# Altium PCB PCB.PcbDoc
Units mm, origin at the board's own origin, x right, y up, seen from the top; angles counter-clockwise.
Board outline 100 x 100 mm, 2 copper layers (Top Layer, Bottom Layer), stack 1.036 mm thick; 40 components, 36 nets, 236 pads, 4 vias.
Unrouted connection lines stored in the file: 122.
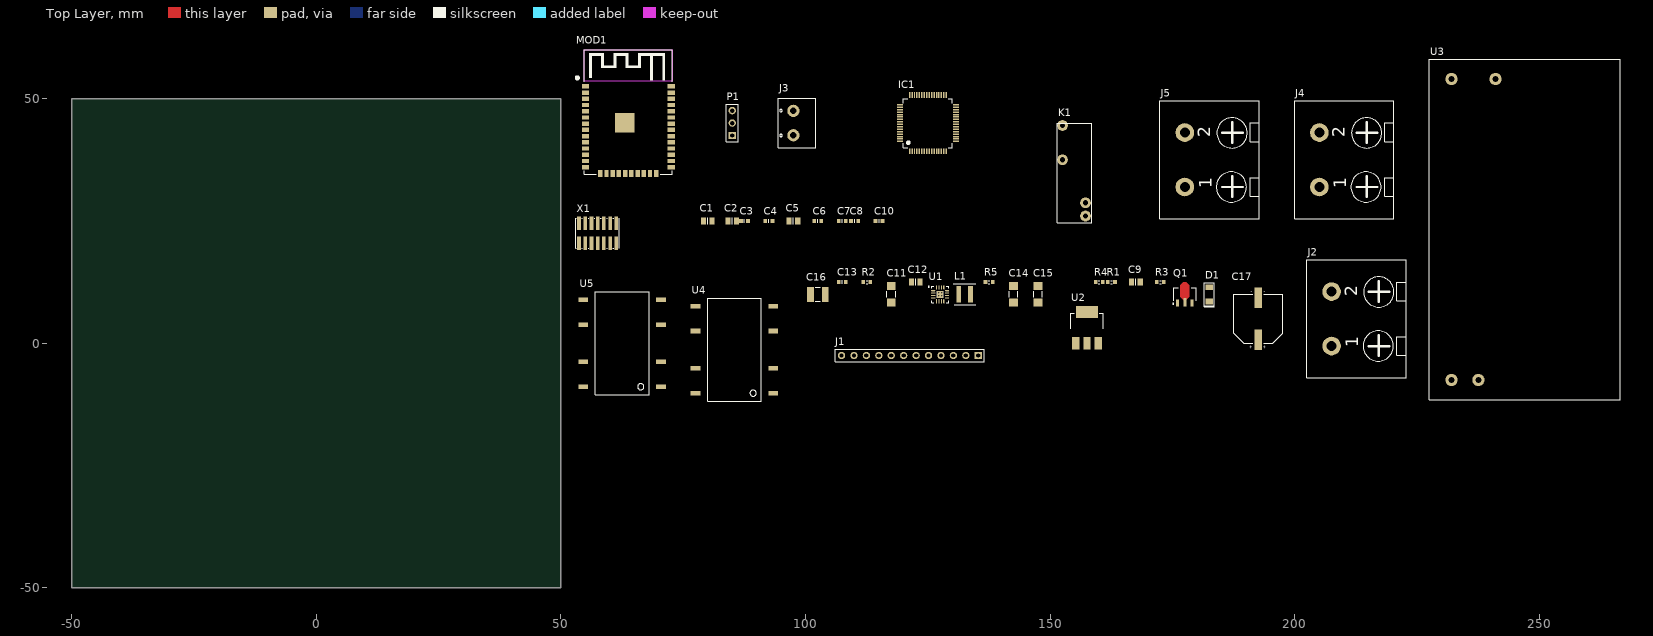
[diagram p0: Top Layer view]
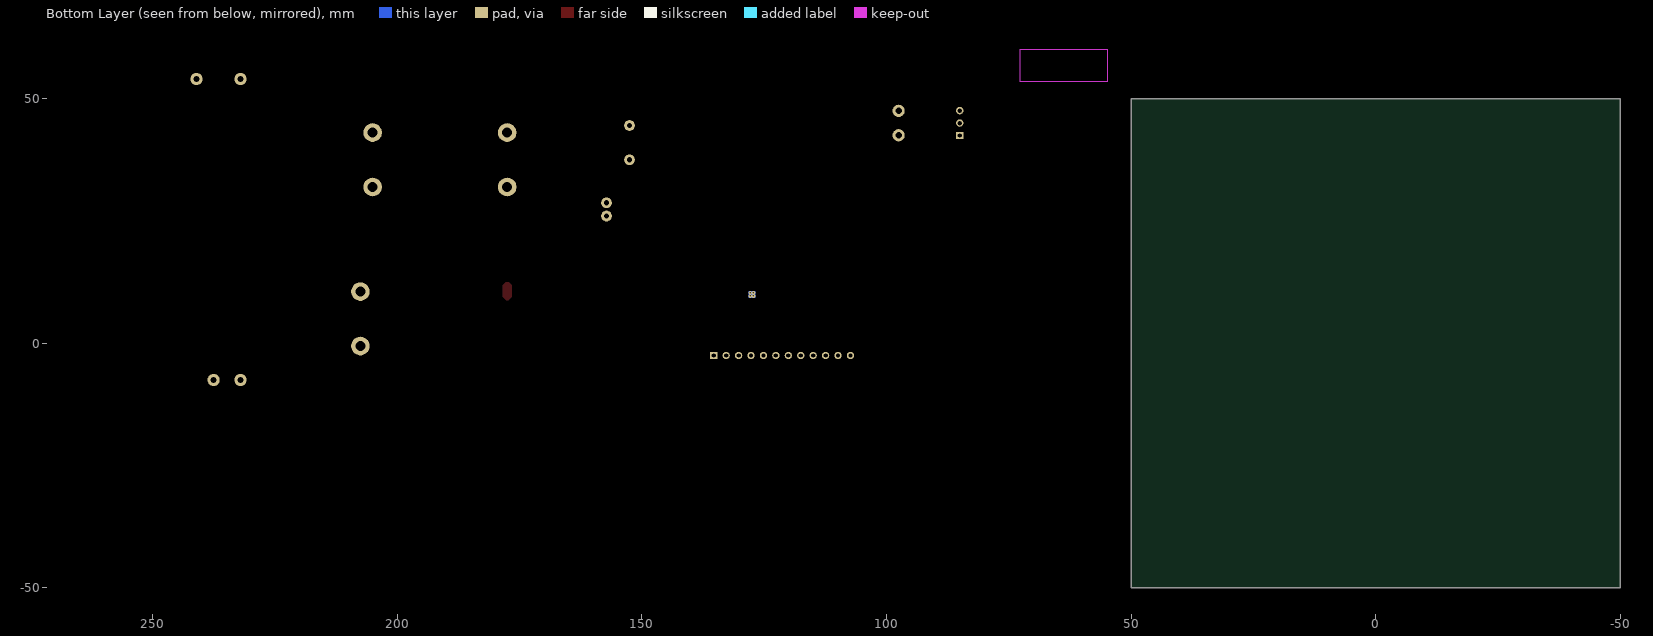
[diagram p1: Bottom Layer view, seen from below]

## Layer stack, top to bottom
Top Solder: solder mask 0.0102, Solder Resist, Dk 3.5
Top Layer: signal copper 0.018
Dielectric1: core 1, FR-4, Dk 4.8
Bottom Layer: signal copper 0.018
Bottom Solder: solder mask 0.0102, Solder Resist, Dk 3.5

## Board outline
-50,-50 50,-50 50,50 -50,50

## Design rules (kind name [scope] priority, off if disabled: settings)
BoardOutlineClearance [All] p1: gap=0.25 ignorepadtopadclearanceinfootprint=FALSE except(0: Arc-SplitContinuation Track-SplitContinuation SMDPad-SplitContinuation THPad-SplitContinuation Via-SplitContinuation Fill-SplitContinuation Poly-SplitContinuation Region-SplitContinuation Text-SplitContinuation)
Clearance Clearance-xPP-xTP-xTT [All] p1: gap=0.15 ignorepadtopadclearanceinfootprint=FALSE except(0: Arc-Hole Track-Hole SMDPad-Hole THPad-Hole Via-Hole Fill-Hole Poly-Hole Region-Hole Text-Hole)
ComponentClearance [All] p1: gap=0.25 collisioncheckmode=3 verticalgap=0.25 showdistances=FALSE
DiffPairsRouting [All] p1: maxlimit=0.25 minlimit=0.25 mostfreqgap=0.25 toplayer_minwidth=0.381 toplayer_maxwidth=0.381 toplayer_prefwidth=0.381 bottomlayer_minwidth=0.381 bottomlayer_maxwidth=0.381 bottomlayer_prefwidth=0.381 maxuncoupledlength=12.5
Height [All] p1: minheight=0 maxheight=25 prefheight=12.5
HoleSize HoleSize-PTH [All] p1: absolutevalues=TRUE maxlimit=2 minlimit=0.5 maxpercent=80.000 minpercent=20.000
HoleToHoleClearance [All] p1: gap=0.35 allowstackedmicrovias=TRUE
MinimumAnnularRing "Minimum IAR  >0.45mm" [((ObjectKind = 'Pad') OR (ObjectKind = 'Via')) And (Layer = 'MultiLayer') And (HoleDiameter > AsMM(0.45))] p1: minimumring=0.175 // minimum inner annular ring for pads > 0.45mm finished hole size
MinimumAnnularRing "Minimum IAR <=0.45mm" [((ObjectKind = 'Pad') OR (ObjectKind = 'Via')) And (Layer = 'MultiLayer') And (HoleDiameter <= AsMM(0.45))] p2: minimumring=0.175 // minimum inner annular ring for pads <= 0.45mm finished hole size
MinimumSolderMaskSliver [All] p1: minsoldermaskwidth=0.08
PlaneClearance PlaneClearance-IPI [All] p1: clearance=0.25
PlaneConnect [All] p1: planeconnectstyle=Relief reliefexpansion=0.175 reliefentries=4 reliefconductorwidth=0.2 reliefairgap=0.2
PolygonConnect PolygonConnect-xTW [All] p1: connectstyle=Relief reliefconductorwidth=0.2 reliefentries=4 polygonreliefangle="90 Angle" airgapwidth=0.2
RoutingCorners [All] p1: cornerstyle=45-Degree minsetback=2.5 maxsetback=2.5
RoutingVias "RoutingVias > 0.45mm" [(ObjectKind = 'Via') And (HoleDiameter > AsMM(0.45))] p1: holewidth=0.5 width=0.85 viastyle="Through Hole" minholewidth=0.5 minwidth=0.85 maxholewidth=0.9 maxwidth=1.25 // finishet hole size > 0.45mm
RoutingVias "RoutingVias <= 0.45mm" [(ObjectKind = 'Via') And (HoleDiameter <= AsMM(0.45))] p2: holewidth=0.3 width=0.65 viastyle="Through Hole" minholewidth=0.25 minwidth=0.6 maxholewidth=0.45 maxwidth=0.8 // finishet hole size <= 0.45mm
SilkToSilkClearance [All] p1: silktosilkclearance=0.2
SilkToSolderMaskClearance SilkscreenOverComponentPads [IsPad] p1: minsilkscreentomaskgap=0.2 clearancetoexposedcopper=TRUE
SolderMaskExpansion [All] p1: expansion=0 istentingtop=FALSE
UnRoutedNet [All] p1: checkbadconnections=TRUE
Width Width-xTW [All] p1: maxlimit=1.5 minlimit=0.15 preferedwidth=0.2
18 further rules are at their usual default settings.

## Components (designator, comment, footprint, x,y, rotation, side; value= is the part's Value field where it differs from the comment)
C1 "Ceramic X7S" C_0805_2012 80,25 r0 top value=4.7uF
C2 "Ceramic X7S" C_0805_2012 85,25 r0 top value=4.7uF
C3 "Ceramic X7R" C_0603_1608 87.5,25 r0 top value=100nF
C4 "Ceramic X7R" C_0603_1608 92.5,25 r0 top value=100nF
C5 "Ceramic X7R" C_0805_2012 97.5,25 r0 top value=1uF
C6 "Ceramic X7R" C_0603_1608 102.5,25 r0 top value=100nF
C7 "Ceramic X7R" C_0603_1608 107.5,25 r0 top value=100nF
C8 "Ceramic X7R" C_0603_1608 110,25 r0 top value=100nF
C9 "Ceramic X7R" C_0805_2012 167.5,12.5 r0 top value=100nF
C10 "Ceramic X7R" C_0603_1608 115,25 r0 top value=100nF
C11 "Ceramic X5R" C_1206_3216 117.5,10 r90 top value=10uF
C12 "Ceramic X7R" C_0805_2012 122.5,12.5 r0 top value=100nF
C13 "Ceramic C0G" C_0603_1608 107.5,12.5 r0 top value=3.3nF
C14 "Ceramic X5R" C_1206_3216 142.5,10 r90 top value=10uF
C15 "Ceramic X5R" C_1206_3216 147.5,10 r90 top value=10uF
C16 "Ceramic X5R" C_1210_3225 102.5,10 r0 top value=22uF
C17 "Electrolytic Capacitor" CE_D_10x10_SMD 192.5,5 r90 top value=100uF
D1 "1N5819HW" SOD123 182.5,10 r90 top value=1N5819HW-7-F
IC1 "STM32F401RBT6" LQFP-64 125,45 r0 top
J1 "Goldpin female straight" J_HEADER_1x12_2.54_VERTICAL 121.31,-2.5 r180 top value=DS1023-1*10S21
J2 "600V 30A connector" J_8PCV-02-006 207.5,5 r90 top value=8PCV-02-006
J3 "ARK2" J_ARK2 97.5,45 r90 top value=DG301-5.0-02P-12-18A(H)
J4 "600V 30A connector" J_8PCV-02-006 205,37.5 r90 top value=8PCV-02-006
J5 "600V 30A connector" J_8PCV-02-006 177.5,37.5 r90 top value=8PCV-02-006
K1 "FTR-F3AA012E" FTR-F3AA012E 157.2,26 r90 top
L1 "Inductor" XFL4020 132.5,10 r0 top value=2.2uH
MOD1 "2.4 GHz Wi-Fi-and-Bluetooth combo chip" MOD_ESP_WROOM_32 63.75,44.245 r0 top value=ESP32-WROOM-32
P1 "Goldpin" P_HEADER_1x3_2.54 85,45 r90 top value=DS1021-1*3SF1-1
Q1 "BFU590QX" SOT89_TO-243AA_N 177.5,10 r0 top
R1 "Resistor" R_0603_1608 162.5,12.5 r0 top value=10k
R2 "Resistor" R_0603_1608 112.5,12.5 r0 top value=100k
R3 "Resistor" R_0603_1608 172.5,12.5 r0 top value=1k
R4 "Resistor" R_0603_1608 160,12.5 r0 top value=1k
R5 "Resistor" R_0603_1608 137.5,12.5 r0 top value=1k
U1 "TPS62133RGTR" QFN16_3x3 127.5,10 r0 top
U2 "LDL1117S33R" SOT223_SC73 157.5,3.2 r0 top
U3 "IRM-30-12" IRM-30-12 232,-7.5 r90 top
U4 "CPC1907B" CPC1907B 85.45,-1.31 r90 top
U5 "CPC1907B" CPC1907B 62.5,0 r90 top
X1 "FTSH-107-01-XXX-DV-K" FTSH-107-01-XXX-DV-K 57.5,22.5 r0 top

## Footprints (in the part's own frame and the unit in brackets; to place one, negate y for a bottom-side part, rotate by r counter-clockwise, add the part's x,y. Pads: shape width x height; smd on the part's side, far side on the other; paste and mask are expansions set on the pad)
C_0603_1608 [mm]
  rect 0.75x0.8 smd: 1(-0.725,0) 2(0.725,0)
  silkscreen extent 0,-0.38 0,0.38, body extent -0.85,-0.45 0.85,0.45, height 0.89
C_0805_2012 [mil]
  rect 42x55 smd: 1(-35,0) 2(35,0)
  silkscreen extent 0,-25 0,25, body extent -43,-29 43,29, height 53
C_1206_3216 [mil]
  rect 64x70 smd: 1(-67,0) 2(67,0)
  silkscreen extent -25,-35 25,35, body extent -67,-35 67,35, height 39
C_1210_3225 [mil]
  rect 54x120 smd: 1(-60,0) 2(60,0)
  silkscreen extent -20,-55 20,55, body extent -72,-55 70,55, height 86
CE_D_10x10_SMD [mm]
  rect 4.2x1.5 smd: 1(-4.262,0) 2(4.262,0)
  silkscreen extent -5,-5 5,5, body extent -5.8,-5.15 5.8,5.15, height 10.2
CPC1907B [mm]
  rect 0.95x2 smd: 1(-8.89,-7.95) 2(-3.81,-7.95) 3(3.81,-7.95) 4(8.89,-7.95) 5(8.89,7.95) 6(3.81,7.95) 7(-3.81,7.95) 8(-8.89,7.95)
  silkscreen extent -10.55,-5.5 10.55,5.5
FTR-F3AA012E [mm]
  round 2.2 hole 1.1: 1(0,0) 2(2.7,0) 3(11.5,4.7) 4(18.5,4.7)
  silkscreen extent -1.32,-1.25 18.98,5.75, body extent -1.32,-1.25 18.98,5.75, height 15
FTSH-107-01-XXX-DV-K [mil] "Samtec 14pin male connector"
  rect 29x110 smd mask+2: 1(-150,-80) 2(-150,80) 3(-100,-80) 4(-100,80) 5(-50,-80) 6(-50,80) 7(0,-80) 8(0,80) 9(50,-80) 10(50,80) 11(100,-80) 12(100,80) 13(150,-80) 14(150,80)
  silkscreen extent -175,-120 175,120, body extent -175,-115 175,115, height 241
IRM-30-12 [mm]
  round 2.5 hole 1.25: 1(0,0) 2(0,-5.5) 3(61.5,0) 4(61.5,-9)
  silkscreen extent -4,-34.5 65.5,4.5, body extent -4,-34.5 65.5,4.5, height 24
J_8PCV-02-006 [mil]
  round 150 hole 80: 1(-219,0) 2(219,0)
  silkscreen extent -474,-600 476,200, body extent -473,-600 475,200, height 770
J_ARK2 [mm]
  round 2.5 hole 1.3: 1(-2.5,0) 2(2.5,0)
  silkscreen extent -5.08,-4.57 5.08,3.05, body extent -5,-4.6 5.6,3, height 10.05
J_HEADER_1x12_2.54_VERTICAL [mm] "Connector; Header; 12 Position; Male-Female"
  rect 1.5x1.5 hole 0.9: 1(-13.97,0)
  round 1.5 hole 0.9: 2(-11.43,0) 3(-8.89,0) 4(-6.35,0) 5(-3.81,0) 6(-1.27,0) 7(1.27,0) 8(3.81,0) 9(6.35,0) 10(8.89,0) 11(11.43,0) 12(13.97,0)
  silkscreen extent -15.24,-1.27 15.24,1.27, body extent -15.49,-1.27 15.49,1.27, height 8.5
LQFP-64 [mm] "LQFP-64 package"
  rect 0.3x1.2 smd: 1(-3.75,-5.75) 2(-3.25,-5.75) 3(-2.75,-5.75) 4(-2.25,-5.75) 5(-1.75,-5.75) 6(-1.25,-5.75) 7(-0.75,-5.75) 8(-0.25,-5.75) 9(0.25,-5.75) 10(0.75,-5.75) 11(1.25,-5.75) 12(1.75,-5.75) 13(2.25,-5.75) 14(2.75,-5.75) 15(3.25,-5.75) 16(3.75,-5.75) 33(3.75,5.75) 34(3.25,5.75) 35(2.75,5.75) 36(2.25,5.75) 37(1.75,5.75) 38(1.25,5.75) 39(0.75,5.75) 40(0.25,5.75) 41(-0.25,5.75) 42(-0.75,5.75) 43(-1.25,5.75) 44(-1.75,5.75) 45(-2.25,5.75) 46(-2.75,5.75) 47(-3.25,5.75) 48(-3.75,5.75)
  rect 1.2x0.3 smd: 17(5.75,-3.75) 18(5.75,-3.25) 19(5.75,-2.75) 20(5.75,-2.25) 21(5.75,-1.75) 22(5.75,-1.25) 23(5.75,-0.75) 24(5.75,-0.25) 25(5.75,0.25) 26(5.75,0.75) 27(5.75,1.25) 28(5.75,1.75) 29(5.75,2.25) 30(5.75,2.75) 31(5.75,3.25) 32(5.75,3.75) 49(-5.75,3.75) 50(-5.75,3.25) 51(-5.75,2.75) 52(-5.75,2.25) 53(-5.75,1.75) 54(-5.75,1.25) 55(-5.75,0.75) 56(-5.75,0.25) 57(-5.75,-0.25) 58(-5.75,-0.75) 59(-5.75,-1.25) 60(-5.75,-1.75) 61(-5.75,-2.25) 62(-5.75,-2.75) 63(-5.75,-3.25) 64(-5.75,-3.75)
  silkscreen extent -5,-5 5,5, body extent -6,-6 6,6, height 1.6
MOD_ESP_WROOM_32 [mm] "Normal"
  rect 1.5x0.9 smd: 1(-8.75,8.255) 2(-8.75,6.985) 3(-8.75,5.715) 4(-8.75,4.445) 5(-8.75,3.175) 6(-8.75,1.905) 7(-8.75,0.635) 8(-8.75,-0.635) 9(-8.75,-1.905) 10(-8.75,-3.175) 11(-8.75,-4.445) 12(-8.75,-5.715) 13(-8.75,-6.985) 14(-8.75,-8.255) 25(8.75,-8.255) 26(8.75,-6.985) 27(8.75,-5.715) 28(8.75,-4.445) 29(8.75,-3.175) 30(8.75,-1.905) 31(8.75,-0.635) 32(8.75,0.635) 33(8.75,1.905) 34(8.75,3.175) 35(8.75,4.445) 36(8.75,5.715) 37(8.75,6.985) 38(8.75,8.255)
  rect 0.9x1.5 smd: 15(-5.715,-9.55) 16(-4.445,-9.55) 17(-3.175,-9.55) 18(-1.905,-9.55) 19(-0.635,-9.55) 20(0.635,-9.55) 21(1.905,-9.55) 22(3.175,-9.55) 23(4.445,-9.55) 24(5.715,-9.55)
  rect 4x4 smd: EP1(-0.7,0.845)
  Keep-Out Layer region: -9.026,15.75 9,15.75 9,9.271 -9.026,9.271
  silkscreen extent -10.67,-9.75 9,15.75, body extent -9.05,-9.77 9.02,15.77, height 3
P_HEADER_1x3_2.54 [mm] "Connector; Header; 3 Position, Male"
  rect 1.5x1.5 hole 0.9: 1(-2.54,0)
  round 1.5 hole 0.9: 2(0,0) 3(2.54,0)
  silkscreen extent -3.81,-1.27 3.81,1.27, body extent -3.71,-1.25 3.91,1.25, height 8.2
QFN16_3x3 [mm] "16-Leads, Body 3,00x3,00mm, Pitch 0,50mm, Thermal Pad 1,45x1,45mm, IPC Medium Density"
  oval 0.85x0.25 smd: 1(-1.425,0.75) 2(-1.425,0.25) 3(-1.425,-0.25) 4(-1.425,-0.75) 9(1.425,-0.75) 10(1.425,-0.25) 11(1.425,0.25) 12(1.425,0.75)
  oval 0.25x0.85 smd: 5(-0.75,-1.425) 6(-0.25,-1.425) 7(0.25,-1.425) 8(0.75,-1.425) 13(0.75,1.425) 14(0.25,1.425) 15(-0.25,1.425) 16(-0.75,1.425)
  rect 1.45x1.45 smd: EP1(0,0)
  Bottom Layer region: -0.725,-0.725 0.725,-0.725 0.725,0.725 -0.725,0.725
  silkscreen extent -2.47,-1.7 1.7,1.7, body extent -1.5,-1.5 1.5,1.5, height 0.9
R_0603_1608 [mm]
  rect 0.75x0.8 smd: 1(-0.725,0) 2(0.725,0)
  silkscreen extent -0.15,-0.3 0.15,0.3, body extent -0.87,-0.47 0.88,0.48, height 0.54
SOD123 [mm]
  rect 1.2x1.5 smd: 1(-1.45,0) 2(1.45,0)
  silkscreen extent -2.57,-1.02 2.34,1.02, body extent -1.86,-0.81 1.84,0.79, height 1.27
SOT89_TO-243AA_N [mm] "SOT89, 3-Leads, Body 4,50x2,45mm, Pitch 1,50mm, Lead Span 4,1mm, IPC Medium Density"
  rect 0.6x1.4 smd: 1(-1.5,-1.8) 3(1.5,-1.8)
  rect 0.6x1.8 smd: 2(0,-1.6)
  Top Layer region: -0.228,-1.219 -0.95,-0.498 -0.95,1.85 -0.3,2.5 0.3,2.5 0.95,1.85 0.95,-0.498 0.229,-1.219
  silkscreen extent -2.47,-2.05 2.3,1.32, body extent -2.25,-2.25 2.25,2, height 1.59
SOT223_SC73 [mm]
  rect 1.5x2.5 smd: 1(-2.3,-3.2) 2(0,-3.2) 3(2.3,-3.2)
  rect 4.5x2.5 smd: 4(0,3.2)
  silkscreen extent -3.36,-0.25 3.34,2.9, body extent -3.36,-3.55 3.34,3.75, height 1.8
XFL4020 [mil]
  rect 38x134 smd: 1(-46.5,0) 2(46.5,0)
  silkscreen extent -90,-85 90,85, body extent -84,-85 85,84, height 83

## Part data
C1 C2: library part C_4.7uF_50V_X7S_0805_10, "Capacitor", Dielectric=X7S, Manufacturer=Murata, Manufacturer Part Number=GRM21BC71H475KE11L, Tolerance (%)=10, Voltage=50V, HelpURL=https://datasheet.octopart.com/GRM21BC71H475KE11L-Murata-datasheet-149523453.pdf, Part Number=C_4.7uF_50V_X7S_0805_10, SCH_Footprint=0805, Supplier 1=TME, Supplier 2="RS Components", Supplier 3=Farnell, Supplier 4=Mouser, Supplier 5=Digi-Key, Supplier 6=LCSC, Supplier Part Number 2=1726970, Supplier Part Number 3=3582876, Supplier Part Number 4=81-GRM21BC71H475KE1L, Supplier Part Number 5=490-12757-1-ND
C3 C4 C6 C7 C8 C10: library part C_100nF_50V_X7R_0603_5, "Capacitor", Dielectric=X7R, Manufacturer=Samsung, Manufacturer Part Number=CL10B104JB8NNNC, Tolerance (%)=5, Voltage=50V, HelpURL=http://www.tme.eu/pl/Document/4a42202b32dab16128fe107dd69598cc/samsung-chip-cap.pdf, Part Number=C_100nF_50V_X7R_0603_5, SCH_Footprint=0603, Supplier 1=TME, Supplier 2="RS Components", Supplier 3=Farnell, Supplier 4=Mouser, Supplier 5=Digi-Key, Supplier 6=LCSC, Supplier Part Number 1=CL10B104JB8NNNC, Supplier Part Number 2=7665455, Supplier Part Number 5=1276-1033-1-ND, Supplier Part Number 6=C24452
C5: library part C_1uF_50V_X7R_0805_10, "Capacitor", Dielectric=X7R, Manufacturer=AVX, Manufacturer Part Number=08055C105KAT2A, Tolerance (%)=10, Voltage=50V, HelpURL=https://sigma.octopart.com/147443767/technical_drawing/AVX-08055C105KAT2A.pdf, Part Number=C_1uF_50V_X7R_0805_10, SCH_Footprint=0805, Supplier 1=TME, Supplier 2="RS Components", Supplier 3=Farnell, Supplier 4=Mouser, Supplier 5=Digi-Key, Supplier 6=LCSC, Supplier Part Number 1=08055C105KAT2A, Supplier Part Number 2=1441427, Supplier Part Number 3=2094043, Supplier Part Number 4=581-08055C105KAT2A, Supplier Part Number 5=478-7956-1-ND
C9 C12: library part C_100nF_50V_X7R_0805_10, "Capacitor", Dielectric=X7R, Manufacturer=AVX, Manufacturer Part Number=08055C104K4T2A, Tolerance (%)=10, Voltage=50V, HelpURL=http://www.tme.eu/pl/Document/943bdb20b23b898c4d4b2ec4eca4f2b6/cauto.pdf, Part Number=C_100nF_50V_X7R_0805_10, SCH_Footprint=0805, Supplier 1=TME, Supplier 2="RS Components", Supplier 3=Farnell, Supplier 4=Mouser, Supplier 5=Digi-Key, Supplier 6=LCSC, Supplier Part Number 1=08055C104K4T2A
C11 C14 C15: library part C_10uF_50V_X5R_1206_10, "Capacitor", Dielectric=X5R, Manufacturer=Murata, Manufacturer Part Number=GRM31CR61H106KA12L, Tolerance (%)=10, Voltage=50V, HelpURL=https://datasheet.octopart.com/GRM31CR61H106KA12L-Murata-datasheet-138746367.pdf, Part Number=C_10uF_50V_X5R_1206_10, SCH_Footprint=1206, Supplier 1=TME, Supplier 2="RS Components", Supplier 3=Farnell, Supplier 4=Mouser, Supplier 5=Digi-Key, Supplier 6=LCSC, Supplier Part Number 1=GRM31CR61H106KA12L, Supplier Part Number 3=1845762
C13: library part C_3.3nF_50V_C0G_0603_5, "Capacitor", Dielectric=C0G, Manufacturer=Murata, Manufacturer Part Number=GRM1885C1H332JA01D, Tolerance (%)=5, Voltage=50V, HelpURL=https://www.murata.com/~/media/webrenewal/support/library/catalog/products/capacitor/mlcc/c02e.ashx, Part Number=C_3.3nF_50V_C0G_0603_5, SCH_Footprint=0603, Supplier 1=TME, Supplier 2="RS Components", Supplier 3=Farnell, Supplier 4=Mouser, Supplier 5=Digi-Key, Supplier 6=LCSC, Supplier Part Number 1=GRM1885C1H332JA01D, Supplier Part Number 2=7235900, Supplier Part Number 3=2470483, Supplier Part Number 4=81-GRM1885C1H332JA1D, Supplier Part Number 5=490-6385-1-ND
C16: library part C_22uF_35V_X5R_1210_20, "Capacitor", Dielectric=X5R, Manufacturer="Taiyo Yuden", Manufacturer Part Number=GMK325BJ226MM-P, Tolerance (%)=20, Voltage=35V, HelpURL=https://datasheet.octopart.com/GMK325BJ226MM-P-Taiyo-Yuden-datasheet-138516745.pdf, Part Number=C_22uF_35V_X5R_1210_20, SCH_Footprint=1210, Supplier 1=TME, Supplier 2="RS Components", Supplier 3=Farnell, Supplier 4=Mouser, Supplier 5=Digi-Key, Supplier 6=LCSC, Supplier Part Number 2=103-4209, Supplier Part Number 4=963-GMK325BJ226MM-P, Supplier Part Number 5=587-5853-6-ND
C17: library part CE_100uF_50V_AL2O3_10x10_20, "Polarized Capacitor", Dielectric=AL2O3, Manufacturer=Nichicon, Manufacturer Part Number=UUX1H101MNL1GS, Tolerance (%)=20, Voltage=50V, HelpURL=https://datasheet.octopart.com/UUX1H101MNL1GS-Nichicon-datasheet-62047998.pdf, Part Number=CE_100uF_50V_AL2O3_10x10_20, SCH_Footprint=10x10, Supplier 1=TME, Supplier 2="RS Components", Supplier 3=Farnell, Supplier 4=Mouser, Supplier 5=Digi-Key, Supplier 6=LCSC, Supplier Part Number 1=UUX1H101MNL1GS, Supplier Part Number 2=7393107, Supplier Part Number 3=2841943, Supplier Part Number 4=647-UUX1H101MNL1GS, Supplier Part Number 5=493-6269-1-ND
D1: library part D_1N5819HW_1A_40V_SOD123, Current=1A, Manufacturer="Diodes Inc", Manufacturer Part Number=1N5819HW-7-F, Voltage=40V, HelpURL=https://datasheet.octopart.com/1N5819HW-7-F-Diodes-Inc.-datasheet-8332965.pdf, Part Number=D_1N5819HW_1A_40V_SOD123, SCH_Footprint=SOD123, Supplier 1=TME, Supplier 2="RS Components", Supplier 3=Farnell, Supplier 4=Mouser, Supplier 5=Digi-Key, Supplier 6=LCSC, Supplier Part Number 1=1N5819HW-7-F, Supplier Part Number 2=7082197, Supplier Part Number 3=1773475, Supplier Part Number 4=621-1N5819HW-F, Supplier Part Number 5=1N5819HW-FDICT-ND
IC1: "ARM Microcontroller"
J1: library part J_HEADER_1x12_2.54_VERTICAL, "Pin Header", Manufacturer=Connfly, Manufacturer Part Number=DS1023-1*10S21, Supplier Part Number 1=ZL262-10SG, HelpURL=https://www.tme.eu/Document/efd0203e2d3a140765df98191085ea88/DS1023.pdf, Part Number=J_HEADER_1x12_2.54_VERTICAL, SCH_Footprint="1x12 2.54mm Vertical", Supplier 1=TME, Supplier 2="RS Components", Supplier 3=Farnell, Supplier 4=Mouser, Supplier 5=Digi-Key, Supplier 6=LCSC
J2 J4 J5: library part J_8PCV-02-006, "ARK Screw terminal, 2-Pin", Manufacturer="TE Connectivity", Manufacturer Part Number=8PCV-02-006, HelpURL=http://www.mouser.com/ds/2/418/NG_CD_6-1437657-3_K4-669783.pdf, Part Number=J_8PCV-02-006, SCH_Footprint=8PCV-02-006, Supplier 1=TME, Supplier 2="RS Components", Supplier 3=Farnell, Supplier 4=Mouser, Supplier 5=Digi-Key, Supplier 6=LCSC, Supplier Part Number 2=7176637, Supplier Part Number 4=571-514376577, Supplier Part Number 5=A98460-ND
J3: library part J_TB-5.0-P-2P, "ARK Screw terminal, 2-Pin", Manufacturer="DEGSON ELECTRONICS", Manufacturer Part Number=DG301-5.0-02P-12-18A(H), Supplier Part Number 1=DG301-5.0-2/6B, HelpURL=https://datasheet.octopart.com/DG301-5.0-03P-12-18A%28H%29-Degson-datasheet-17801202.pdf, Part Number=J_TB-5.0-P-2P, SCH_Footprint=ARK2, Supplier 1=TME, Supplier 2="RS Components", Supplier 3=Farnell, Supplier 4=Mouser, Supplier 5=Digi-Key, Supplier 6=LCSC
L1: library part L_2.2uH_8A_XFL4020, "Induction", Current=8A, Manufacturer=Coilcraft, Manufacturer Part Number=XFL4020-222MEC, Resistance=23.5mR, HelpURL=https://pl.mouser.com/datasheet/2/597/xfl4020-270756.pdf, Part Number=L_2.2uH_8A_XFL4020, SCH_Footprint=XFL4020, Supplier 1=TME, Supplier 2="RS Components", Supplier 3=Farnell, Supplier 4=Mouser, Supplier 5=Digi-Key, Supplier 6=LCSC, Supplier 7=Coilcraft, Supplier Part Number 3=2289216, Supplier Part Number 4=994-XFL4020-222MEC, Supplier Part Number 7=XFL4020-222MEC
MOD1: library part MOD_ESP32-WROOM-32, Manufacturer=ESPRESSIF, Manufacturer Part Number=ESP32-WROOM-32, HelpURL=https://www.espressif.com/sites/default/files/documentation/esp32-wroom-32d_esp32-wroom-32u_datasheet_en.pdf, Part Number=MOD_ESP32-WROOM-32, SCH_Footprint=MOD_ESP_WROOM_32, Supplier 1=TME, Supplier 2="RS Components", Supplier 3=Farnell, Supplier 4=Mouser, Supplier 5=Digi-Key, Supplier 6=LCSC, Supplier Part Number 1=ESP32-WROOM-32, Supplier Part Number 2=169-7594, Supplier Part Number 4=356-ESP-WROOM-32, Supplier Part Number 5=1904-1010-1-ND
P1: library part P_HEADER_1x3_2.54, "Pin Header", Manufacturer=Connfly, Manufacturer Part Number=DS1021-1*3SF1-1, Supplier Part Number 1=ZL201-03G, HelpURL=http://www.tme.eu/en/Document/cc301e58a5da78cb543a94b5a5b7f06a/DS1021.pdf, Part Number=P_HEADER_1x3_2.54, SCH_Footprint="1x3 2.54mm", Supplier 1=TME, Supplier 2="RS Components", Supplier 3=Farnell, Supplier 4=Mouser, Supplier 5=Digi-Key, Supplier 6=LCSC
Q1: library part QNP_BFU590QX, Current=200mA, Manufacturer=NXP, Voltage=12V, HelpURL=https://www.nxp.com/docs/en/data-sheet/BFU590Q.pdf, Manufacturer Part Number=BFU590QX, Part Number=QNP_BFU590QX, SCH_Footprint=SOT89, Supplier 1=TME, Supplier 2="RS Components", Supplier 3=Farnell, Supplier 4=Mouser, Supplier 5=Digi-Key, Supplier 6=LCSC, Supplier Part Number 3=2776273, Supplier Part Number 4=771-BFU590QX, Supplier Part Number 5=568-11522-1-ND, Type=NPN
R1: library part R_10k_0603_1, Manufacturer=Vishay, Manufacturer Part Number=CRCW060310K0FKTABC, Power=100mW, Tolerance=1%, Voltage=75V, HelpURL=http://www.tme.eu/pl/Document/622e28308c06d160637f2b14751ba16b/Data%20Sheet%20CRCW_BCe3.pdf, Part Number=R_10k_0603_1, SCH_Footprint=0603, Supplier 1=TME, Supplier 2="RS Components", Supplier 3=Farnell, Supplier 4=Mouser, Supplier 5=Digi-Key, Supplier 6=LCSC, Supplier Part Number 1=CRCW060310K0FKTABC, Supplier Part Number 4=667-ERJ-3EKF1002V, Supplier Part Number 5=P10KGCT-ND
R2: library part R_100k_0603_1, Manufacturer=Royalohm, Manufacturer Part Number=0603SAF1003T5E, Power=100mW, Supplier Part Number 1=SMD0603-100K-1%, Tolerance=1%, Voltage=50V, HelpURL=http://www.tme.eu/pl/Document/b315665a56acbc42df513c99b390ad98/ROYALOHM-THICKFILM.pdf, Part Number=R_100k_0603_1, SCH_Footprint=0603, Supplier 1=TME, Supplier 2="RS Components", Supplier 3=Farnell, Supplier 4=Mouser, Supplier 5=Digi-Key, Supplier 6=LCSC, Supplier Part Number 4=667-ERJ-3EKF1003V, Supplier Part Number 5=P100KHCT-ND
R3 R4 R5: library part R_1k_0603_1, Manufacturer=Vishay, Manufacturer Part Number=CRCW06031K00FKEA, Power=100mW, Tolerance=1%, Voltage=75V, HelpURL=http://www.farnell.com/datasheets/2310790.pdf?_ga=2.256888843.1690599162.1548417389-1379097396.1542296996&_gac=1.262631934.1547230258.Cj0KCQiAmuHhBRD0ARIsAFWyPwhX8HcvXnM3tA0ZBodZLzDIjH2ZxLpjT5LWo9bad_HPRbU8LfPq44UaAhEwEALw_wcB, Part Number=R_1k_0603_1, SCH_Footprint=0603, Supplier 1=TME, Supplier 2="RS Components", Supplier 3=Farnell, Supplier 4=Mouser, Supplier 5=Digi-Key, Supplier 6=LCSC, Supplier Part Number 2=678-9875P, Supplier Part Number 3=1469740, Supplier Part Number 4=71-CRCW0603-1.0K-E3, Supplier Part Number 5=541-1.00KHCT-ND
U1: library part VS_TPS62133RGTR, "3-17V 3A Step-Down Converter with DCS-Control in 3x3 QFN", Frequency (kHz)=2500, Manufacturer="Texas Instruments", HelpURL=https://www.ti.com/lit/ds/symlink/tps62133.pdf?ts=1622201106793&ref_url=https%253A%252F%252Fwww.ti.com%252Fproduct%252FTPS62133%253FHQS%253DTI-null-null-octopart-df-pf-null-wwe, Imax (A)=3, Iswitch (A)=0, Manufacturer Part Number=TPS62133RGTR, Part Number=VS_TPS62133RGTR, SCH_Footprint=QFN16, Supplier 1=TME, Supplier 2="RS Components", Supplier 3=Farnell, Supplier 4=Mouser, Supplier 5=Digi-Key, Supplier 6=LCSC, Supplier Part Number 3=3122975, Supplier Part Number 4=595-TPS62133RGTR, Supplier Part Number 5=296-29937-1-ND, Supplier Part Number 6=C73973, Topology=Buck, Vin max (V)=17, Vin min (V)=3, Vout max (V)=5, Vout min (V)=5
U2: library part VL_LDL1117S33R, "typical configuration", Current=1.2A, Manufacturer=STMicroelectronics, Voltage=3.3V, HelpURL=https://www.st.com/resource/en/datasheet/ldl1117.pdf, Manufacturer Part Number=LDL1117S33R, Part Number=VL_LDL1117S33R, SCH_Footprint=SOT223, Supplier 1=TME, Supplier 2="RS Components", Supplier 3=Farnell, Supplier 4=Mouser, Supplier 5=Digi-Key, Supplier 6=LCSC, Supplier Part Number 1=LDL1117S33R, Supplier Part Number 3=2729708, Supplier Part Number 4=511-LDL1117S33R, Supplier Part Number 5=497-17239-1-ND
X1: "IDC 14pin male connector"

## Via types
v1: diameter 0.8, hole 0.3, Top Layer to Bottom Layer, 4 vias

## Nets (pads, with @x,y where several pads share a name; then routed paths per layer and width w, separated by ;. In a path a pad name is that pad's centre, name@x,y a point inside that pad or via, vN(x,y) a via of type N, cw(c..) or ccw(c..) an arc to the next point about the centre after c; other vN are vias at no path point)
3.3V: C1.1 C3.1 C4.1 C5.1 C6.1 C7.1 C8.1 C10.1 C15.1 IC1.1 IC1.13 IC1.19 IC1.32 IC1.48 IC1.64 MOD1.2 MOD1.3 U2.2 U2.4 X1.3
5V: C16.1 J1.1 L1.2 P1.1 R2.2 U1.14
12V: C11.1 C12.1 C14.1 C17.1 D1.1 K1.1 U1.10 U1.11 U1.12 U1.13 U2.3 U3.4
Elektromagnes: IC1.50 R3.1
GND: C1.2 C2.2 C3.2 C4.2 C5.2 C6.2 C7.2 C8.2 C9.2 C10.2 C11.2 C12.2 C13.2 C14.2 C15.2 C16.2 C17.2 IC1.12 IC1.18 IC1.31 IC1.47 IC1.63 J1.11 J1.12 MOD1.1 MOD1.15 MOD1.38 P1.3 Q1.1 R1.1 U1.5 U1.6 U1.7 U1.8 U1.15 U1.16 U1.EP1 U2.1 U3.3 U4.3 U5.3 X1.5 X1.7 X1.11
  other v1: 127.175,9.675 127.825,9.675 127.175,10.325 127.825,10.325
Grzałka_1: IC1.44 R4.1
Grzałka_2: IC1.45 R5.1
L: J2.1 K1.3 U3.1 U4.7 U4.8 U5.7 U5.8
LCD_BL: IC1.20 J1.6
LCD_CS: IC1.14 J1.7
LCD_DC: IC1.17 J1.5
MISO: IC1.22
MOSI: IC1.23 J1.8
N: J2.2 J3.2 J4.2 J5.2 U3.2
NetC2_1: C2.1 IC1.30
NetC13_1: C13.1 U1.9
NetD1_2: D1.2 K1.2 Q1.2
NetIC1_60: IC1.60 R1.2
NetJ3_1: J3.1 K1.4
NetJ4_1: J4.1 U4.5 U4.6
NetJ5_1: J5.1 U5.5 U5.6
NetL1_1: L1.1 U1.1 U1.2 U1.3
NetQ1_3: Q1.3 R3.2
NetR2_1: R2.1 U1.4
NetR4_2: R4.2 U4.2
NetR5_2: R5.2 U5.2
NISO: J1.9
RST: C9.1 IC1.7 X1.12
RX: IC1.42 MOD1.34
SCLK: IC1.21 J1.10
SWDCLK: IC1.49 X1.6
SWDIO: IC1.46 X1.4
TP_CS: IC1.15 J1.3
TP_IRQ: IC1.16 J1.2
TX: IC1.43 MOD1.35
WS2812B: IC1.41 P1.2
pads on no net: IC1.2 IC1.3 IC1.4 IC1.5 IC1.6 IC1.8 IC1.9 IC1.10 IC1.11 IC1.24 IC1.25 IC1.26 IC1.27 IC1.28 IC1.29 IC1.33 IC1.34 IC1.35 IC1.36 IC1.37 IC1.38 IC1.39 IC1.40 IC1.51 IC1.52 IC1.53 IC1.54 IC1.55 IC1.56 IC1.57 IC1.58 IC1.59 IC1.61 IC1.62 J1.4 MOD1.4 MOD1.5 MOD1.6 MOD1.7 MOD1.8 MOD1.9 MOD1.10 MOD1.11 MOD1.12 MOD1.13 MOD1.14 MOD1.16 MOD1.17 MOD1.18 MOD1.19 MOD1.20 MOD1.21 MOD1.22 MOD1.23 MOD1.24 MOD1.25 MOD1.26 MOD1.27 MOD1.28 MOD1.29 MOD1.30 MOD1.31 MOD1.32 MOD1.33 MOD1.36 MOD1.37 MOD1.EP1 U4.1 U4.4 U5.1 U5.4 X1.1 X1.2 X1.8 X1.9 X1.10 X1.13 X1.14

## Text inside footprints (layer, text, board x,y; h text height)
C17: Top Overlay "-" at 193.592,10.258 h0.7; Top Overlay "-" at 190.951,10.258 h0.7; Top Overlay "+" at 193.516,-0.385 h0.7 r270; Top Overlay "+" at 190.773,-0.385 h0.7 r270
J2: Top Overlay "2" at 212.707,9.597 h2.54 r90; Top Overlay "1" at 212.961,-0.817 h2.54 r90
J4: Top Overlay "2" at 210.207,42.097 h2.54 r90; Top Overlay "1" at 210.461,31.683 h2.54 r90
J5: Top Overlay "2" at 182.707,42.097 h2.54 r90; Top Overlay "1" at 182.961,31.683 h2.54 r90